# Allegro board remotepanasonicDB9-rout-V3-0.brd
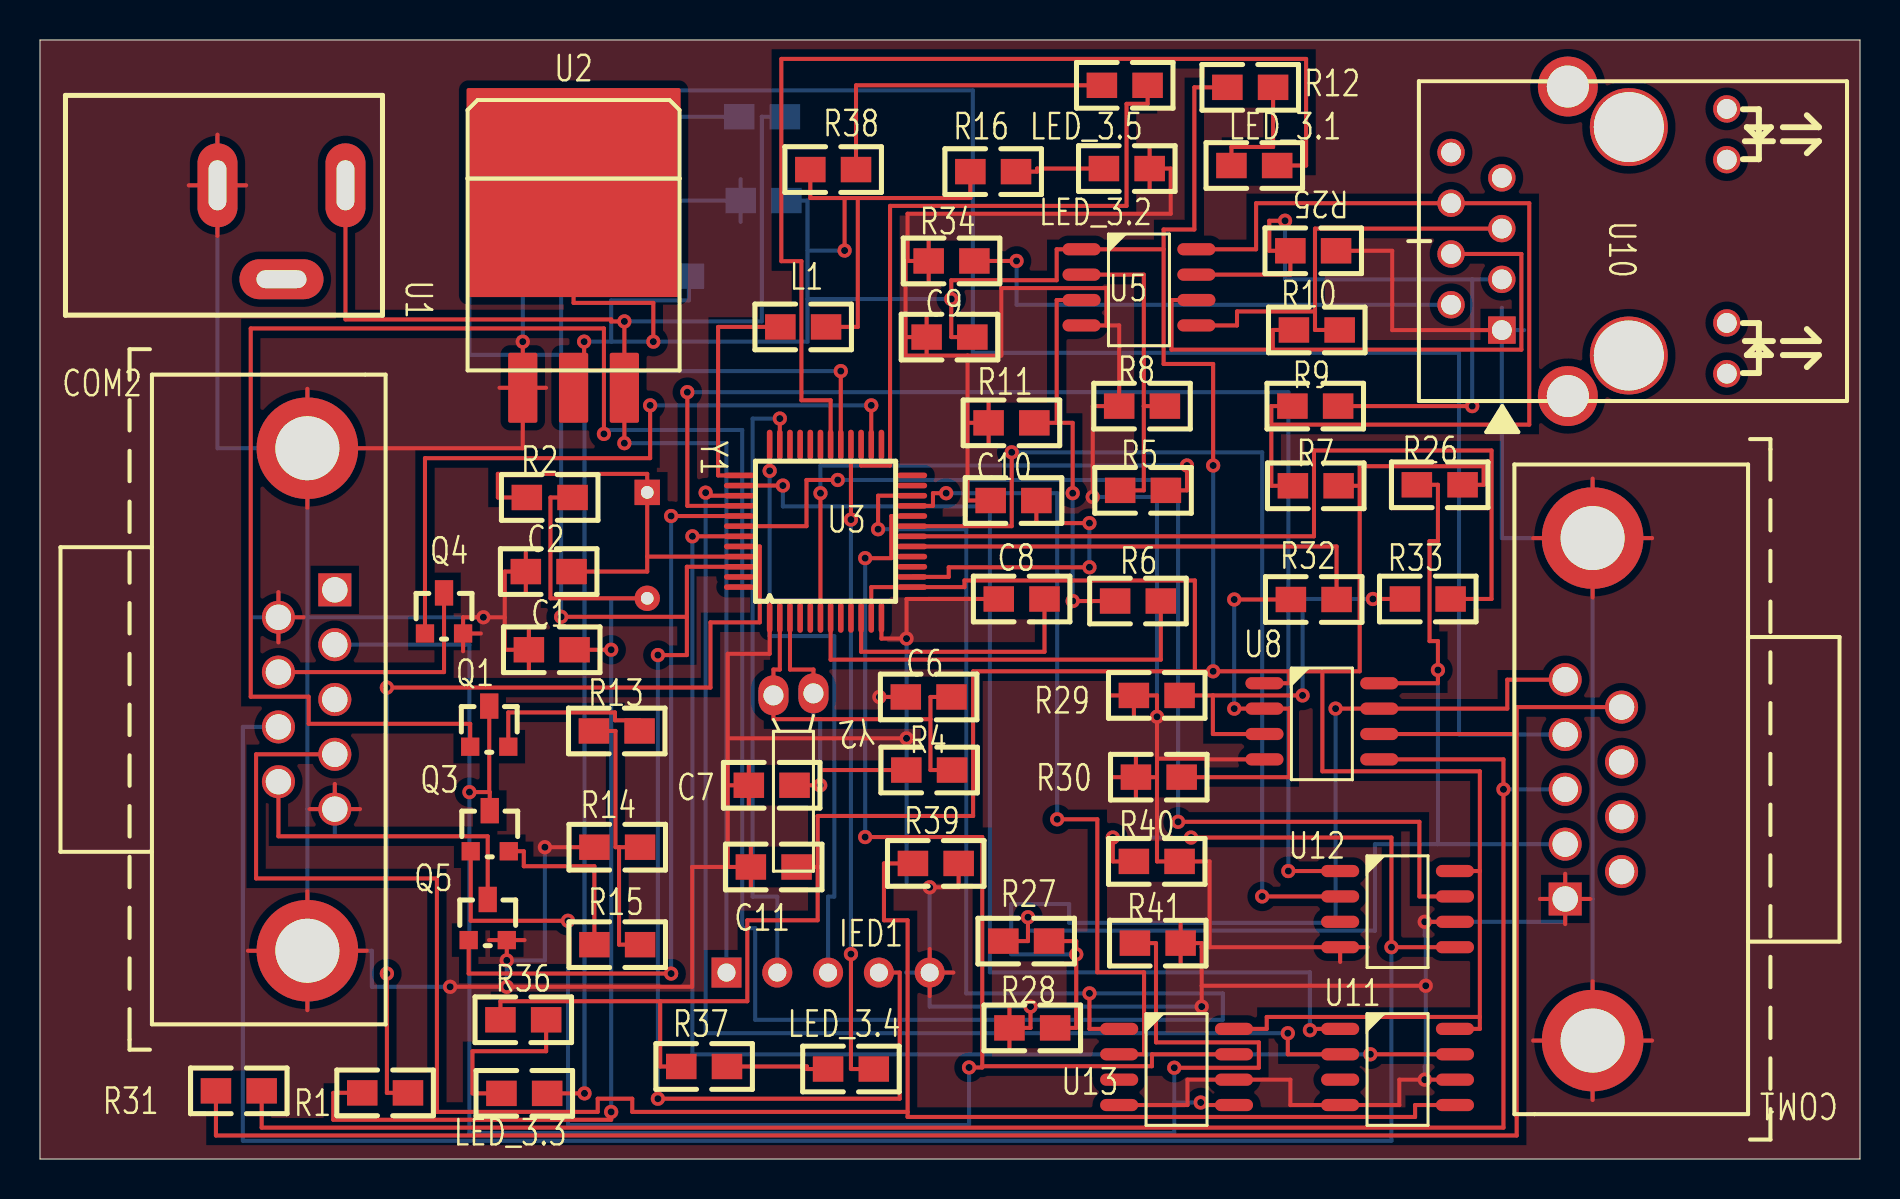
[diagram p0: board, top side]
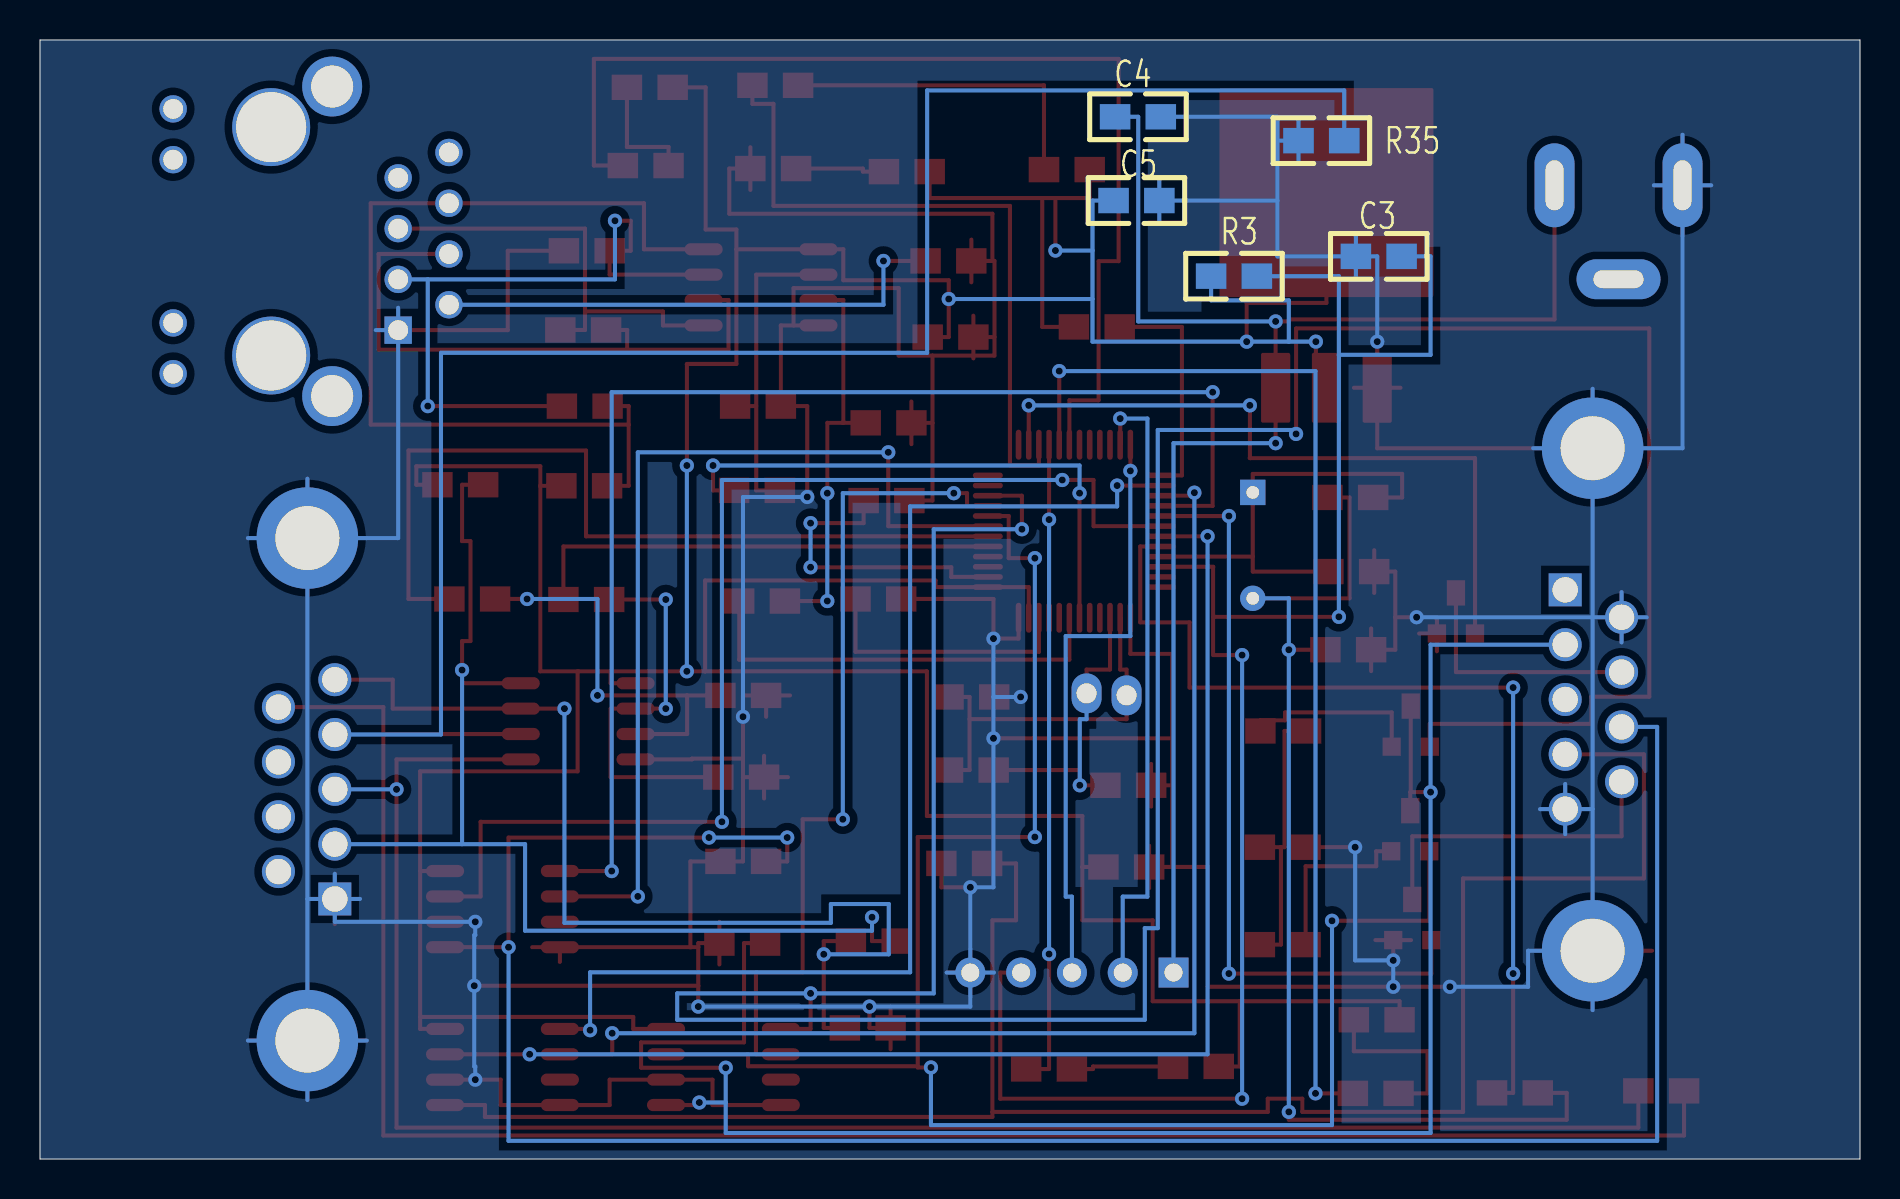
[diagram p1: board, bottom side, seen from below]

Outline 91 x 56 mm; copper layers: TOP, BOTTOM. Coordinates in mm from the lower left corner of the outline.
Outline path: 0,56 91,56 91,0 0,0 0,56

## Placement (name value [footprint] x y rotation side)
C1  20p  [0805]  25.59 25.49 0 top
C2  20p  [0805]  25.43 29.4 0 top
C3  10u  [0805]  24.06 45.17 180 bottom
C4  10u  [0805]  36.1 52.16 180 bottom
C5  22u  [0805]  36.18 47.96 180 bottom
C6  20p  [0805]  44.43 23.12 0 top
C7  20p  [0805]  36.58 18.7 0 top
C8  10u  [0805]  49.08 28.03 0 top
C9  0.1u  [0805]  45.47 41.13 0 top
C10  0.1u  [0805]  48.68 32.95 0 top
C11  0.1u  [0805]  36.69 14.61 0 top
COM1  BOXCONN_DB9  [DB9RA_M]  76.26 18.5 180 top
COM2  BOXCONN_DB9  [DB9RA_M]  14.74 23 0 top
IED1  <Value>  [HDR1X5]  34.32 9.33 0 top
L1  R0  [0805]  38.16 41.64 0 top
LED_3.1  RED  [0805]  60.71 49.72 0 top
LED_3.2  RED  [0805]  54.34 49.56 0 top
LED_3.3  RED  [0805]  24.21 3.29 0 top
LED_3.4  RED  [0805]  40.55 4.5 0 top
LED_3.5  RED  [0805]  54.24 53.73 0 top
Q1  2N7002LT1  [SOT23_B]  22.46 21.62 0 top
Q3  2N7002LT1  [SOT23_B]  22.49 16.39 0 top
Q4  2N7002LT1  [SOT23_B]  20.2 27.29 0 top
Q5  2N7002LT1  [SOT23_B]  22.39 11.95 0 top
R1  33  [0805]  17.26 3.31 0 top
R2  1M  [0805]  25.48 33.11 0 top
R3  10k  [0805]  31.3 44.18 180 bottom
R4  10M  [0805]  44.46 19.47 0 top
R5  22  [0805]  55.15 33.46 0 top
R6  22  [0805]  54.9 27.92 0 top
R7  4.7k  [0805]  63.79 33.69 0 top
R8  10k  [0805]  55.1 37.68 0 top
R9  100  [0805]  63.76 37.68 0 top
R10  100  [0805]  63.84 41.49 0 top
R11  10k  [0805]  48.57 36.84 0 top
R12  330  [0805]  60.51 53.63 0 top
R13  4.7k  [0805]  28.84 21.42 0 top
R14  0  [0805]  28.86 15.6 0 top
R15  15k  [0805]  28.86 10.73 0 top
R16  330  [0805]  47.66 49.41 0 top
R25  4.7k  [0805]  63.66 45.45 180 top
R26  4.7k  [0805]  69.99 33.74 0 top
R27  100  [0805]  49.31 10.91 0 top
R28  4.7k  [0805]  49.61 6.56 0 top
R29  10k  [0805]  55.84 23.2 0 top
R30  10k  [0805]  55.94 19.11 0 top
R31  100  [0805]  9.94 3.41 0 top
R32  22  [0805]  63.69 28 0 top
R33  22  [0805]  69.39 28.03 0 top
R34  0  [0805]  45.58 44.94 0 top
R35  0  [0805]  26.93 50.96 180 bottom
R36  330  [0805]  24.16 6.97 0 top
R37  330  [0805]  33.21 4.63 0 top
R38  330  [0805]  39.66 49.51 0 top
R39  50k  [0805]  44.79 14.79 0 top
R40  50k  [0805]  55.84 14.89 0 top
R41  50k  [0805]  55.89 10.8 0 top
U1  DC205A  [DC205]  15.27 48.73 270 top
U2  AMS1086CM-3.3  [TO262]  26.68 45.09 0 top
U3  NUC122LC1AN  [NUC122LQFP48]  36.48 27.09 0 top
U5  MAX3488  [SOP8]  52.08 45.53 0 top
U8  MAX3488  [SOP8]  61.22 23.81 0 top
U10  RJ45  [HR911105A]  68.94 45.93 270 top
U11  X9C103  [SOP8]  65.01 6.51 0 top
U12  X9C103  [SOP8]  65.01 14.41 0 top
U13  X9C103  [SOP8]  53.96 6.51 0 top
Y1  12M  [XALTDIP2]  30.36 33.36 270 top
Y2  32k  [XTAL-3_4MM-2P]  38.97 23.4 180 top

## Library data of the parts
C1-C3 C6-C11 = CAPACITOR NON-POL
C4 C5 = CAP NP
COM1 COM2 = CONNECTOR DB9_1
IED1 = CON5
L1 R1-R11 R13-R15 R25-R35 R39-R41 = R
LED_3.1-LED_3.5 = LED
Q1 Q3-Q5 = NPN_3
R12 R16 R36-R38 = RES1
U1 = DC205A
U2 = AMS1117
U3 = NUC122LC1AN
U5 U8 = MAX485
U10 = RJ45
U11-U13 = X9C103
Y1 Y2 = CRYSTAL

## Footprints (pads in the part's own frame, mm; a bottom-side part is the same pattern mirrored in y, then rotated)
0805
  rect 1.524x1.27 smd: 1(-1.143,0) 2(1.143,0)
DB9RA_M
  rect 1.651x1.651 hole 1.27: 1(0,5.486)
  round 1.651 hole 1.27: 2(0,2.743) 3(0,0) 4(0,-2.743) 5(0,-5.486) 6(-2.819,4.115) 7(-2.819,1.372) 8(-2.819,-1.372) 9(-2.819,-4.115)
  round 5.08 hole 3.2: 10(-1.372,12.573) 11(-1.372,-12.573)
DC205
  oval 4.2x2 hole 2.5x0.889: 1(0,0) 2(0,-6.4)
  oval 2x4.2 hole 0.889x2.5: 3(4.7,-3.2)
HDR1X5
  rect 1.5x1.5 hole 0.9: 1(0,0)
  round 1.5 hole 0.9: 2(2.54,0) 3(5.08,0) 4(7.62,0) 5(10.16,0)
HR911105A
  round 3.9 hole 3.5 unplated: (-5.707,10.498) (5.723,10.498)
  rect 1.372x1.372 hole 0.991: 1(4.453,4.148)
  round 1.372 hole 0.991: 2(3.183,1.608) 3(1.913,4.148) 4(0.643,1.608) 5(-0.627,4.148) 6(-1.897,1.608) 7(-3.167,4.148) 8(-4.437,1.608) 9(6.633,15.398) 10(4.093,15.398) 11(-4.077,15.398) 12(-6.617,15.398)
  round 2.997 hole 2.1: M3(-7.737,7.448) M4(7.753,7.448)
NUC122LQFP48
  oval 0.279x1.5 smd: 1(0,0) 2(0.508,0) 3(1.016,0) 4(1.524,0) 5(2.032,0) 6(2.54,0) 7(3.048,0) 8(3.556,0) 9(4.064,0) 10(4.572,0) 11(5.08,0) 12(5.588,0) 25(5.588,8.66) 26(5.08,8.66) 27(4.572,8.66) 28(4.064,8.66) 29(3.556,8.66) 30(3.048,8.66) 31(2.54,8.66) 32(2.032,8.66) 33(1.524,8.66) 34(1.016,8.66) 35(0.508,8.66) 36(0,8.66)
  oval 1.5x0.279 smd: 13(7.124,1.536) 14(7.124,2.044) 15(7.124,2.552) 16(7.124,3.06) 17(7.124,3.568) 18(7.124,4.076) 19(7.124,4.584) 20(7.124,5.092) 21(7.124,5.6) 22(7.124,6.108) 23(7.124,6.616) 24(7.124,7.124) 37(-1.536,7.124) 38(-1.536,6.616) 39(-1.536,6.108) 40(-1.536,5.6) 41(-1.536,5.092) 42(-1.536,4.584) 43(-1.536,4.076) 44(-1.536,3.568) 45(-1.536,3.06) 46(-1.536,2.552) 47(-1.536,2.044) 48(-1.536,1.536)
SOP8
  oval 1.905x0.61 smd: 1(0,0) 2(0,-1.27) 3(0,-2.54) 4(0,-3.81) 5(5.74,-3.81) 6(5.74,-2.54) 7(5.74,-1.27) 8(5.74,0)
SOT23_B
  rect 0.914x1.27 smd: D(0,1.041)
  rect 0.914x0.914 smd: G(-0.953,-0.991) S(0.953,-0.991)
TO262
  custom 1.46x3.5 smd: 1(-2.54,-6.5) 2(0,-6.5) 3(2.54,-6.5)
  custom 10.7x10.46 smd: 4(0,3.27)
XALTDIP2
  rect 1.27x1.27 hole 0.635: 1(0,0)
  round 1.27 hole 0.635: 2(5.3,0)
XTAL-3_4MM-2P
  oval 1.5x2 hole 1: 1(0.3,0.1) 2(2.3,0.2)

## Nets
GND: C1.1 C2.1 C3.1 C4.2 C5.2 C6.1 C7.1 C8.1 C9.1 C10.1 C11.1 COM1.1 COM1.10 COM1.11 COM2.5 COM2.6 COM2.10 COM2.11 IED1.5 LED_3.2.2 Q4.S Q5.S R8.1 R11.1 R14.1 R25.1 R28.1 R29.1 R30.1 R34.1 R35.1 R39.2 R40.2 R41.2 U1.2(GND) U2.1(GND) U3.1(PVSS) U3.12(VSS) U5.4(GND) U8.4(GND) U10.1 U11.4(VSS) U11.6(VL) U12.4(VSS) U12.6(VL) U13.4(VSS) U13.6(VL)
VCC: C5.1 C9.2 C11.2 L1.2 R3.1 R7.2 R12.1 R16.1 R26.2 R36.1 R37.1 R38.1 U2.2(VOUT) U2.4(TAB) U3.11(VDD) U3.13(VBUS) U5.1(VCC) U8.1(VCC) U11.8(VCC) U12.8(VCC) U13.8(VCC)
VCC5: C4.1 IED1.1 U1.1(VCC) U2.3(VIN)
422AI: R7.1 R9.1 U5.8(A) U10.6
422AO: COM1.2 R26.1 R27.1 U8.8(A)
422BI: R9.2 R25.2 U5.7(B) U10.3
422BO: COM1.5 R27.2 R28.2 U8.7(B)
422YI: R10.2 U5.5(Y) U10.5
422YO: COM1.3 R31.2 U8.5(Y)
422ZI: R10.1 U5.6(Z) U10.4
422ZO: COM1.9 R31.1 U8.6(Z)
A_AUDIO: COM2.7 Q4.D
A_AUDIO-I: COM2.8 R40.1 U12.5(VW)
A_INPUT: Q4.G U3.26(PC12)
A_INPUT1: Q5.G U3.41(PD3)
B_AUDIO: COM2.2 Q1.D Q3.D R41.1 U13.5(VW)
B_AUDIO-F: COM2.4 R39.1 U11.5(VW)
B_NET1: Q1.G U3.22(PC0/SPISS00) U13.1(I\N\C\)
B_NET2: U3.21(PC1/SPICLK0) U13.2(U/U\)
B_NET3: Q3.G U3.20(PC2/MISO00) U13.7(C\S\)
B_NET11: U3.38(PD0) U11.1(I\N\C\)
B_NET21: U3.39(PD1) U11.2(U/U\)
B_NET31: U3.40(PD2) U12.1(I\N\C\)
B_NET41: U3.19(PC3/MOSI00) U12.2(U/U\)
FOCUS_CS: U3.43(PD5) U11.7(C\S\)
ICECLK: IED1.3 U3.36(ICE_CK)
ICEDATA: IED1.2 U3.35(ICE_DAT)
ICEREST: C3.2 IED1.4 R3.2 U3.46(/RESET)
IRIS_AUTO: COM2.9 Q5.D
IRIS_CS: U3.42(PD4) U12.7(C\S\)
PC8: LED_3.1.2 U3.30(PC8/SPISS10)
PC9: LED_3.3.2 U3.29(PC9/SPICLK1)
PC10: LED_3.4.2 U3.28(PC10/MISO10)
PC11: LED_3.5.2 U3.27(PC11/MOS110)
RXI: R5.1 R8.2 U5.2(RO)
RXO: R30.2 R32.1 U8.2(RO)
TXI: R6.1 R11.2 U5.3(DI)
TXO: R29.2 R33.1 U8.3(DI)
N5217252: C1.2 R1.1 R2.2 Y1.2
N5217271: C2.2 R2.1 U3.45(XT1_IN) Y1.1
N5217301: R1.2 U3.44(XT1_OUT)
N5217606: L1.1 U3.37(AVDD)
N5217811: C6.2 R4.2 U3.2(X32O) Y2.2
N5217823: C7.2 R4.1 U3.3(X321) Y2.1
N5218166: R5.2 U3.6(RXD1/PB4)
N5218170: R6.2 U3.7(TXD1/PB5)
N5218267: C8.2 U3.10(LDO)
N5218423: C10.2 U3.14(VDD33)
N5286003: R32.2 U3.17(PB0/RXD0)
N5286012: R33.2 U3.18(PB1/TXD0)
N5287388: R34.2 U10.2
N5287624: COM1.4 R35.2
N5294368: COM2.3
N5312954: Q1.S R13.2
N5312978: Q3.S R15.1
N5314984: R13.1 R14.2 R15.2
N52191170: LED_3.2.1 R16.2
N52191690: LED_3.1.1 R12.2
N52878630: LED_3.3.1 R36.2
N52879570: LED_3.4.1 R37.2
N52880520: LED_3.5.1 R38.2

Pads without a net: COM1 6 7 8; COM2 1; U1 3; U3 4 5 8 9 15 16 23 24 25 31 32 33 34 47 48; U10 7 8 9 10 11 12 M3 M4; U11 3; U12 3; U13 3

## Via types
v1: diameter 0.711, hole 0.356, TOP to BOTTOM, 88 vias

## Routing (per net, layer and track width the routed paths; a pad name or vN(x,y) marks a point on that pad's centre or on a via; arc(x,y) is an arc through that point)
GND: length 589.6
  TOP w0.203: 34.39,18.7 34.39,21.05 ; 34.39,18.7 C7.1 ; 34.39,18.7 34.39,14.61 ; 34.39,21.05 34.39,25.28 36.48,25.28 U3.1 ; 34.39,21.05 v1(43.33,21.05) ; 55.85,19.11 55.85,14.89 R40.2 58.48,14.89 58.48,10.6 ; 55.85,19.11 55.85,20.04 ; 55.85,19.11 R30.1 ; LED_3.2.2 56.54,49.56 56.54,47.3 43.38,47.3 43.38,44.94 ; LED_3.2.2 55.48,50.63 ; LED_3.2.2 55.48,48.5 ; Q4.S 21.15,27.11 v1(22.17,27.11) 23.24,27.11 ; Q4.S 21.15,25.41 ; Q4.S 22.04,26.3 ; C11.1 34.39,14.61 ; C11.1 35.54,13.55 ; C11.1 35.54,15.68 ; 34.39,14.61 32.61,14.61 32.61,8.62 v1(23.34,8.62) v1(20.51,8.62) ; 75,13.01 COM1.1 ; COM1.1 76.26,14.27 ; COM1.1 77.52,13.01 ; COM1.1 76.26,11.76 ; 47.43,35.77 R11.1 ; R11.1 47.43,37.91 ; R11.1 46.38,36.84 ; COM1.10 80.6,5.93 ; COM1.10 77.63,8.9 ; COM1.10 77.63,2.96 ; COM1.10 74.66,5.93 ; 54.8,18.04 R30.1 ; R30.1 53.6,19.11 ; R30.1 54.8,20.18 ; v1(58.09,7.63) 58.09,8.67 ; 58.09,8.67 v1(69.29,8.67) ; 58.09,8.67 58.09,10.6 ; COM2.11 13.37,13.4 ; COM2.11 13.37,7.45 ; COM2.11 10.4,10.42 ; COM2.11 16.34,10.42 ; R14.1 v1(25.24,15.6) ; 24.29,28.33 C2.1 ; C2.1 24.29,30.46 ; C2.1 23.24,29.4 23.24,27.11 ; U11.6 v1(69.24,3.97) 67.97,3.97 67.97,2.7 U11.4 62.52,2.7 62.52,3.97 U13.6 57.37,3.97 57.37,2.7 U13.4 ; 23.24,27.11 23.24,25.49 C1.1 ; U5.4 53.32,41.72 ; 53.32,41.72 53.96,41.72 R8.1 52.64,37.68 v1(52.64,33.13) ; 53.32,41.72 53.32,43.58 48.07,43.58 48.07,40.2 46.38,40.2 ; COM2.10 24.14,35.57 U2.1 ; COM2.10 13.37,32.6 ; COM2.10 13.37,38.54 ; 43.28,41.13 43.28,40.2 46.38,40.2 ; 43.28,41.13 43.28,44.94 43.38,44.94 ; 43.28,41.13 C9.1 ; U2.1 22.98,38.59 ; U2.1 v1(24.14,40.9) ; U2.1 25.3,38.59 ; C1.1 24.44,26.55 ; C1.1 24.44,24.42 ; U1.2 8.87,51.26 ; U1.2 8.87,46.19 ; U1.2 7.44,48.73 ; U1.2 10.31,48.73 ; 77.63,28.1 COM1.11 ; COM1.11 77.63,34.05 ; COM1.11 74.66,31.07 ; COM1.11 80.6,31.07 ; R41.2 58.09,10.8 58.09,10.6 ; R41.2 57.03,9.74 ; R41.2 57.03,11.87 ; Q5.S 24.23,10.96 ; Q5.S v1(23.34,9.94) ; Q5.S 22.45,10.96 ; 44.43,43.87 R34.1 ; R34.1 43.38,44.94 ; R34.1 44.43,46.01 ; 35.44,17.64 C7.1 ; C7.1 35.44,19.77 ; U12.4 66.39,10.6 ; U12.4 58.48,10.6 ; U12.4 65.01,9.86 ; 58.48,10.6 58.09,10.6 ; COM2.5 16,17.51 ; COM2.5 13.48,17.51 ; COM2.5 14.74,18.77 ; C10.1 46.38,32.95 46.38,36.84 ; 46.38,40.2 46.38,36.84 ; R28.1 49.53,6.56 v1(49.53,7.63) ; R28.1 48.47,5.5 ; R28.1 48.47,7.63 ; R39.2 45.93,13.6 v1(44.48,13.6) ; 53.5,23.2 R29.1 ; R29.1 55.85,23.2 v1(55.85,22.13) 55.85,20.04 ; R29.1 54.69,22.13 ; 11.92,25.85 11.92,27.11 ; 11.92,27.11 13.18,27.11 ; 11.92,27.11 11.92,28.37 ; IED1.5 45.67,9.33 ; IED1.5 44.48,10.51 ; IED1.5 44.48,8.15 ; U3.12 42.07,26.04 v1(43.33,26.04) 43.33,28.03 C8.1 ; 44.33,40.06 C9.1 ; C9.1 44.33,42.2 ; 55.85,20.04 58.4,20.04 58.4,20 U8.4 ; U12.6 v1(69.24,11.87) ; R25.1 67.61,45.45 67.61,41.48 U10.1 ; C6.1 v1(41.97,23.12)
  BOTTOM w0.203: v1(22.17,27.11) 13.37,27.11 ; 13.37,27.11 11.92,27.11 ; 13.37,27.11 13.37,17.51 ; 13.37,27.11 COM2.10 ; 13.37,7.45 COM2.11 ; COM2.11 13.37,17.51 ; COM2.11 16.59,10.42 16.59,8.62 v1(20.51,8.62) ; v1(43.33,26.04) 43.33,23.12 ; 43.33,23.12 v1(43.33,21.05) 43.33,13.6 v1(44.48,13.6) IED1.5 ; 43.33,23.12 v1(41.97,23.12) ; COM2.5 14.74,18.77 ; COM2.5 14.74,16.25 ; COM2.5 13.37,17.51 ; COM2.5 16,17.51 ; 7.44,48.73 U1.2 ; U1.2 10.31,48.73 ; U1.2 8.87,51.26 ; U1.2 8.87,35.57 COM2.10 ; v1(52.64,33.13) 55.85,33.13 v1(55.85,22.13) ; C4.2 29.13,52.16 29.13,50.96 ; COM1.1 76.26,11.87 v1(69.24,11.87) 69.24,11.21 69.29,11.21 v1(69.29,8.67) 69.29,4.63 69.24,4.63 v1(69.24,3.97) ; COM1.1 75,13.01 ; COM1.1 76.26,14.27 ; COM1.1 77.63,13.01 ; COM1.11 77.63,34.05 ; COM1.11 80.6,31.07 ; COM1.11 77.63,13.01 ; COM1.11 73.09,31.07 U10.1 ; C5.2 35.04,49.03 ; C5.2 29.13,47.96 ; C5.2 35.04,46.9 ; 11.92,27.11 11.92,28.37 ; 11.92,27.11 11.92,25.85 ; 11.92,27.11 10.66,27.11 ; 77.63,13.01 COM1.10 ; COM1.10 74.66,5.93 ; COM1.10 77.63,2.96 ; COM1.10 80.6,5.93 ; 29.13,47.96 29.13,45.17 C3.1 ; 29.13,47.96 29.13,50.96 ; COM2.10 16.34,35.57 ; COM2.10 13.37,38.54 ; U10.1 74.21,41.48 ; U10.1 73.09,42.6 ; v1(23.34,8.62) v1(23.34,9.94) 25.24,9.94 v1(25.24,15.6) ; v1(58.09,7.63) v1(49.53,7.63) 44.48,7.63 IED1.5 ; 43.3,9.33 IED1.5 ; IED1.5 45.67,9.33 ; R35.1 28.08,52.03 ; R35.1 28.08,49.89 ; R35.1 29.13,50.96 ; v1(24.14,40.9) 24.14,45.17 C3.1 ; C3.1 25.21,46.24 ; C3.1 25.21,44.1
VCC: length 273
  TOP w0.203: U2.2 27.21,38.59 v1(27.21,40.9) ; U11.8 71.99,6.51 71.99,7.11 ; 64.12,24.41 64.12,19.4 71.99,19.4 71.99,14.41 ; 64.12,24.41 65.99,24.41 65.99,33.69 ; 64.12,24.41 62.47,24.41 ; R26.2 72.18,33.74 72.18,34.67 65.99,34.67 65.99,33.69 ; U2.4 26.68,42.84 30.67,42.84 v1(30.67,40.9) ; 40.89,48.09 40.23,48.09 ; 40.89,48.09 40.89,41.64 L1.2 ; 40.89,48.09 46.52,48.09 R16.1 ; 40.23,48.09 38.52,48.09 R38.1 ; 40.23,48.09 v1(40.23,45.46) ; 57.74,24.41 57.74,28.95 46.22,28.95 46.22,28.62 U3.13 41.56,28.62 U3.11 ; 57.74,24.41 46.66,24.41 46.66,17.17 38.88,17.17 38.88,14.61 ; 57.74,24.41 v1(58.66,24.41) 62.47,24.41 ; R36.1 23.02,7.9 31.01,7.9 ; 62.47,24.41 62.47,23.81 U8.1 ; C9.2 45.56,41.13 v1(45.56,43.04) 45.56,43.98 50.83,43.98 50.83,45.53 U5.1 56.18,45.53 ; 56.18,45.53 56.18,39.79 58.66,39.79 v1(58.66,34.7) ; 56.18,45.53 56.18,46.52 57.72,46.52 57.72,53.63 R12.1 ; 65.99,33.69 R7.2 ; U13.8 61.34,6.51 61.34,7.11 71.99,7.11 ; 71.99,7.11 71.99,14.41 ; 71.99,14.41 U12.8 ; 31.01,7.9 31.01,4.63 R37.1 ; 31.01,7.9 35.37,7.9 35.37,11.95 38.88,11.95 38.88,14.61 ; 38.88,14.61 C11.2
  BOTTOM w0.203: 38.38,43.04 38.38,40.9 v1(30.67,40.9) 28.56,40.9 ; 38.38,43.04 38.38,45.46 ; 38.38,43.04 v1(45.56,43.04) ; 28.56,40.9 v1(27.21,40.9) ; 28.56,40.9 28.56,42.97 32.44,42.97 R3.1 ; v1(58.66,24.41) v1(58.66,34.7) ; 38.38,45.46 v1(40.23,45.46) ; 38.38,45.46 38.38,47.96 C5.1
VCC5: length 76.7
  TOP w0.203: U1.1 15.27,42.02 28.56,42.02 28.56,41.91 v1(29.22,41.91) U2.3 v1(29.22,35.82)
  BOTTOM w0.203: 37.25,52.16 36.09,52.16 36.09,41.91 v1(29.22,41.91) ; v1(29.22,35.82) 34.32,35.82 IED1.1
422AI: length 49
  TOP w0.203: 61.57,36.75 61.57,37.68 R9.1 ; 61.57,36.75 74.46,36.75 74.46,47.83 U10.6 60.8,47.83 60.8,45.53 57.82,45.53 ; 61.57,36.75 61.57,33.69 R7.1
422AO: length 57.8
  TOP w0.203: R26.1 69.9,33.74 69.9,30.92 69.48,30.92 69.48,25.92 69.9,25.92 v1(69.9,24.47) 69.9,23.81 U8.8 ; R27.1 49.4,10.91 v1(49.4,12.1)
  BOTTOM w0.203: v1(49.4,12.1) 49.4,11.43 66.75,11.43 66.75,15.76 69.9,15.76 ; 69.9,15.76 COM1.2 ; 69.9,15.76 v1(69.9,24.47)
422BI: length 36.1
  TOP w0.203: R9.2 v1(71.61,37.68) ; v1(62.25,46.95) 61.46,46.95 61.46,45.45 R25.2 62.52,44.26 57.82,44.26
  BOTTOM w0.203: 71.61,44.02 U10.3 ; 71.61,44.02 62.25,44.02 v1(62.25,46.95) ; 71.61,44.02 v1(71.61,37.68)
422BO: length 53.3
  TOP w0.203: COM1.5 73.36,23.99 73.36,22.54 U8.7 v1(64.78,22.54) ; R27.2 51.81,10.91 v1(51.81,10.25) 51.81,6.56 R28.2
  BOTTOM w0.203: v1(64.78,22.54) 64.78,11.82 51.46,11.82 51.46,12.76 48.56,12.76 48.56,10.25 v1(51.81,10.25)
422YI: length 22.3
  TOP w0.203: U10.5 63.75,46.56 63.75,42.41 ; 63.75,42.41 59.85,42.41 59.85,41.72 57.82,41.72 ; 63.75,42.41 63.75,41.49 R10.2
422YO: length 91.7
  TOP w0.203: R31.2 11.08,1.57 73.17,1.57 v1(73.17,18.5) 73.17,20 U8.5
  BOTTOM w0.203: COM1.3 v1(73.17,18.5)
422ZI: length 31.6
  TOP w0.203: 61.64,40.5 74.07,40.5 74.07,45.29 U10.4 ; 61.64,40.5 61.64,41.49 R10.1 ; 61.64,40.5 56.57,40.5 56.57,42.99 57.82,42.99
422ZO: length 100.8
  TOP w0.203: U8.6 73.83,21.27 ; 73.83,21.27 73.83,22.62 COM1.9 ; 73.83,21.27 73.83,1.18 8.8,1.18 R31.1
A_AUDIO: length 12.2
  TOP w0.203: COM2.7 20.2,24.37 Q4.D
A_AUDIO-I: length 114.5
  TOP w0.203: v1(53.64,16.09) 53.64,14.89 R40.1 ; v1(57.55,16.09) 67.57,16.09 v1(67.57,10.6) U12.5
  BOTTOM w0.203: v1(67.57,10.6) 67.57,0.91 10.14,0.91 10.14,21.62 COM2.8 ; v1(53.64,16.09) v1(57.55,16.09)
A_INPUT: length 35.7
  TOP w0.203: U3.26 v1(41.56,37.71) ; Q4.G 19.25,35.07 30.51,35.07 v1(30.51,37.71)
  BOTTOM w0.203: v1(41.56,37.71) v1(30.51,37.71)
A_INPUT1: length 38.1
  TOP w0.203: Q5.G 21.43,9.28 v1(31.56,9.28) ; U3.41 v1(31.56,32.18)
  BOTTOM w0.203: v1(31.56,32.18) v1(31.56,9.28)
B_AUDIO: length 95.7
  TOP w0.203: 22.46,18.36 22.49,18.36 Q3.D ; 22.46,18.36 Q1.D ; 22.46,18.36 v1(21.47,18.36) ; v1(56.71,4.57) 60.94,4.57 60.94,5.84 55.8,5.84 55.8,10.8 R41.1 ; v1(58.03,2.83) 58.03,2.7 U13.5
  BOTTOM w0.203: 56.71,2.83 v1(58.03,2.83) ; 56.71,2.83 56.71,1.3 21.47,1.3 v1(21.47,18.36) 21.47,25.74 COM2.2 ; 56.71,2.83 v1(56.71,4.57)
B_AUDIO-F: length 99
  TOP w0.203: R39.1 42.2,14.79 42.2,11.95 43.38,11.95 43.38,2.36 ; 43.38,2.36 43.38,2.1 68.75,2.1 68.75,2.7 U11.5 ; 43.38,2.36 29.61,2.36 29.61,3.02 27.89,3.02 27.89,2.36 19.85,2.36 19.85,14.04 10.8,14.04 10.8,20.25 COM2.4
B_NET1: length 163.9
  TOP w0.203: U13.1 52.47,6.51 v1(52.47,8.29) ; v1(41.9,31.52) 41.9,33.19 U3.22 ; Q1.G 21.51,21.78 13.43,21.78 13.43,23.14 10.54,23.14 10.54,41.56 28.2,41.56 v1(28.2,36.29)
  BOTTOM w0.203: v1(28.2,36.29) 28.2,36.48 35.11,36.48 35.11,11.55 35.76,11.55 35.76,6.97 59.14,6.97 59.14,8.29 v1(52.47,8.29) 46.31,8.29 46.31,31.52 v1(41.9,31.52)
B_NET2: length 41.6
  TOP w0.203: v1(50.86,17) 52.87,17 52.87,9.34 55.2,9.34 55.2,5.24 U13.2 ; U3.21 44.65,32.69 44.65,33.32 v1(45.31,33.32)
  BOTTOM w0.203: v1(45.31,33.32) 50.86,33.32 v1(50.86,17)
B_NET3: length 91.1
  TOP w0.203: Q3.G 21.54,11.92 v1(26.4,11.92) ; v1(41.26,30.07) 42.56,30.07 42.56,32.18 U3.20 ; v1(41.26,16.11) 47.11,16.11 47.11,4.64 ; v1(46.45,4.58) 47.11,4.58 47.11,4.64 ; 47.11,4.64 55.6,4.64 55.6,5.24 U13.7
  BOTTOM w0.203: v1(41.26,30.07) v1(41.26,16.11) ; v1(26.4,11.92) 26.4,1.7 46.45,1.7 v1(46.45,4.58)
B_NET11: length 57.4
  TOP w0.203: U3.38 v1(37.14,33.7) ; v1(63.5,6.45) 63.5,6.51 U11.1
  BOTTOM w0.203: v1(37.14,33.7) 37.14,32.66 47.49,32.66 47.49,9.34 63.5,9.34 v1(63.5,6.45)
B_NET21: length 61.6
  TOP w0.203: v1(62.39,6.3) 62.39,5.24 U11.2 ; v1(33.28,33.35) 33.28,33.19 U3.39
  BOTTOM w0.203: v1(62.39,6.3) 33.28,6.3 v1(33.28,33.35)
B_NET31: length 64.9
  TOP w0.203: U12.1 v1(62.42,14.41) ; U3.40 32.37,32.69 v1(32.37,38.38)
  BOTTOM w0.203: v1(62.42,14.41) 62.42,38.38 v1(32.37,38.38)
B_NET41: length 47.3
  TOP w0.203: U3.19 48.59,31.67 v1(48.59,35.37) ; U12.2 v1(61.11,13.14)
  BOTTOM w0.203: v1(61.11,13.14) 61.11,35.37 v1(48.59,35.37)
FOCUS_CS: length 66.4
  TOP w0.203: U11.7 v1(66.52,5.24) ; U3.43 v1(32.62,31.16)
  BOTTOM w0.203: v1(66.52,5.24) 32.62,5.24 v1(32.62,31.16)
ICECLK: length 30
  TOP w0.203: U3.36 v1(36.48,34.44)
  BOTTOM w0.203: v1(36.48,34.44) 36.48,26.17 39.71,26.17 39.71,13.13 39.4,13.13 IED1.3
ICEDATA: length 31.6
  TOP w0.203: U3.35 v1(36.99,37.05)
  BOTTOM w0.203: v1(36.99,37.05) 35.63,37.05 35.63,13.13 36.86,13.13 IED1.2
ICEREST: length 88.5
  TOP w0.203: v1(30.9,25.22) 32.34,25.22 32.34,27.13 ; IED1.4 42.99,9.33 42.99,3.02 v1(30.9,3.02) ; 32.34,27.13 32.34,29.64 U3.46 ; 32.34,27.13 v1(26.06,27.13)
  BOTTOM w0.203: v1(30.9,3.02) v1(30.9,25.22) ; R3.2 26.06,44.18 26.06,40.24 ; C3.2 21.47,45.17 21.47,40.24 26.06,40.24 ; 26.06,40.24 v1(26.06,27.13)
IRIS_AUTO: length 16.4
  TOP w0.203: COM2.9 11.92,16.15 22.39,16.15 Q5.D
IRIS_CS: length 59
  TOP w0.203: U3.42 38.32,31.67 38.32,33.98 v1(39.89,33.98) ; v1(56.9,16.87) 68.97,16.87 68.97,13.14 U12.7
  BOTTOM w0.203: v1(39.89,33.98) 56.9,33.98 v1(56.9,16.87)
PC8: length 54.8
  TOP w0.203: U3.30 39.53,37.97 38.07,37.97 38.07,44.93 37.07,44.93 37.07,55.05 63.31,55.05 63.31,49.72 LED_3.1.2
PC9: length 54.5
  TOP w0.203: U3.29 v1(40.04,39.43) ; LED_3.3.2 v1(27.22,3.29)
  BOTTOM w0.203: v1(27.22,3.29) 27.22,39.43 v1(40.04,39.43)
PC10: length 32.4
  TOP w0.203: U3.28 v1(40.55,32) ; LED_3.4.2 40.55,4.5 v1(40.55,10.26)
  BOTTOM w0.203: v1(40.55,32) v1(40.55,10.26)
PC11: length 34.4
  TOP w0.203: LED_3.5.2 55.38,52.8 54.33,52.8 54.33,47.7 42.5,47.7 42.5,34.7 41.06,34.7 U3.27
RXI: length 16.1
  TOP w0.203: R5.1 55.19,33.46 55.19,37.68 ; 55.19,37.68 55.19,44.26 U5.2 ; 55.19,37.68 R8.2
RXO: length 19.9
  TOP w0.203: v1(59.71,22.54) U8.2 62.47,22.54 62.47,19.11 R30.2 ; R32.1 v1(59.71,28)
  BOTTOM w0.203: v1(59.71,28) v1(59.71,22.54)
TXI: length 20.3
  TOP w0.203: v1(51.63,33.32) 51.63,36.84 50.83,36.84 ; 53.76,27.92 v1(51.63,27.92) ; 50.83,36.84 50.83,42.99 U5.3 ; 50.83,36.84 R11.2
  BOTTOM w0.203: v1(51.63,27.92) v1(51.63,33.32)
TXO: length 20.6
  TOP w0.203: 58.64,23.2 R29.2 ; 58.64,23.2 58.64,21.27 U8.3 ; 58.64,23.2 v1(63.13,23.2) ; R33.1 v1(66.65,28.03)
  BOTTOM w0.203: v1(63.13,23.2) 63.13,28.03 v1(66.65,28.03)
N5217252: length 57.4
  TOP w0.203: v1(28.56,2.36) 28.56,1.96 14.66,1.96 14.66,3.31 R1.1 ; Y1.2 25.52,28.06 25.52,33.11 R2.2 ; C1.2 v1(28.56,25.49)
  BOTTOM w0.203: Y1.2 28.56,28.06 v1(28.56,25.49) v1(28.56,2.36)
N5217271: length 23.4
  TOP w0.203: C2.2 30.36,29.4 30.36,30.15 ; 30.36,30.15 Y1.1 30.36,34.29 22.89,34.29 22.89,33.11 R2.1 ; 30.36,30.15 U3.45
N5217301: length 48.1
  TOP w0.203: U3.44 35.99,30.65 35.99,26.86 33.52,26.86 33.52,23.59 v1(17.34,23.59) ; R1.2 17.34,3.31 v1(17.34,9.28)
  BOTTOM w0.203: v1(17.34,23.59) v1(17.34,9.28)
N5217606: length 11.6
  TOP w0.203: L1.1 33.9,41.64 33.9,34.21 U3.37
N5217811: length 19
  TOP w0.203: 44.52,22.01 36.67,22.01 Y2.2 36.67,24.49 36.99,24.49 U3.2 ; 44.52,22.01 44.52,23.12 C6.2 ; 44.52,22.01 44.52,19.47 R4.2
N5217823: length 16.2
  TOP w0.203: Y2.1 38.67,24.49 37.5,24.49 U3.3 ; C7.2 v1(39.01,18.7) 39.01,19.47 R4.1
  BOTTOM w0.203: v1(39.01,18.7) 39.01,22.01 38.67,22.01 Y2.1
N5218166: length 28.2
  TOP w0.203: v1(57.35,34.7) 57.35,33.46 R5.2 ; U3.6 v1(39.02,33.32)
  BOTTOM w0.203: v1(57.35,34.7) 39.02,34.7 v1(39.02,33.32)
N5218170: length 21.5
  TOP w0.203: R6.2 56.04,24.99 39.53,24.99 U3.7
N5218267: length 13.5
  TOP w0.203: U3.10 41.06,25.38 50.22,25.38 C8.2
N5218423: length 15.3
  TOP w0.203: v1(52.47,31.82) 49.82,31.82 C10.2 ; v1(52.47,29.61) 45.44,29.61 45.44,29.13 U3.14
  BOTTOM w0.203: v1(52.47,29.61) v1(52.47,31.82)
N5286003: length 23.9
  TOP w0.203: U3.17 64.83,30.65 R32.2
N5286012: length 42.7
  TOP w0.203: U3.18 63.7,31.16 63.7,35.45 72.58,35.45 72.58,28.03 R33.2
N5287388: length 26
  TOP w0.203: R34.2 v1(48.83,44.94)
  BOTTOM w0.203: v1(48.83,44.94) 48.83,42.75 U10.2
N5287624: length 85.2
  BOTTOM w0.203: COM1.4 70.95,21.24 70.95,40.34 46.64,40.34 46.64,53.48 25.79,53.48 R35.2
N5312954: length 9.2
  TOP w0.203: Q1.S 23.41,22.35 28.75,22.35 28.75,21.95 29.98,21.95 R13.2
N5312978: length 9
  TOP w0.203: R15.1 27.72,14.65 24.19,14.65 24.19,15.4 Q3.S
N5314984: length 14.1
  TOP w0.203: R13.1 28.77,21.42 28.77,15.6 28.95,15.6 ; 28.95,15.6 R14.2 ; 28.95,15.6 28.95,10.73 R15.2
N52191170: length 4.5
  TOP w0.203: R16.2 49.86,49.41 49.86,49.56 LED_3.2.1
N52191690: length 6
  TOP w0.203: R12.2 61.65,50.64 59.57,50.64 LED_3.1.1
N52878630: length 8.8
  TOP w0.203: LED_3.3.1 21.62,3.29 21.62,5.39 25.31,5.39 R36.2
N52879570: length 5.2
  TOP w0.203: LED_3.4.1 38.35,4.5 38.35,4.63 R37.2
N52880520: length 16.5
  TOP w0.203: LED_3.5.1 40.8,53.73 R38.2

## Copper pours and planes (outline as drawn; the poured copper is in the pictures)
GND on TOP: 0,0 0,56 91,56 91,0 ; 53 cut-outs
GND on BOTTOM: 0,0 0,56 91,56 91,0 ; 21 cut-outs

## Text on the board
DIMENSION: FIGURE | SIZE | 14.0 | 25.0 | 35.43 | 39.0 | 39.37 | 50.0 | 82.68 | 126.0 | 137.8 | 98.42x35.0 | DRILL CHART: TOP to BOTTOM | ALL UNITS ARE IN MILS | PLATED | NON-PLATED | QTY | 88 | 2 | 5 | 1 | 11 | 18 | 4
